# Altium PCB BEAGLEPLAYV020_220915.brd.PcbDoc (part 12 of 12)
Units mil, origin at the board's own origin, x right, y up, seen from the top; angles counter-clockwise.
Board outline 3149.7 x 3149.7 mil, 8 copper layers (TOP, LYR2_GND, LYR3, LAY4_PWR1, LAY5_PWR2, LAY6, LYR7_GND, BOTTOM), stack 60.84 mil thick; 782 components, 546 nets, 2864 pads, 2056 vias.
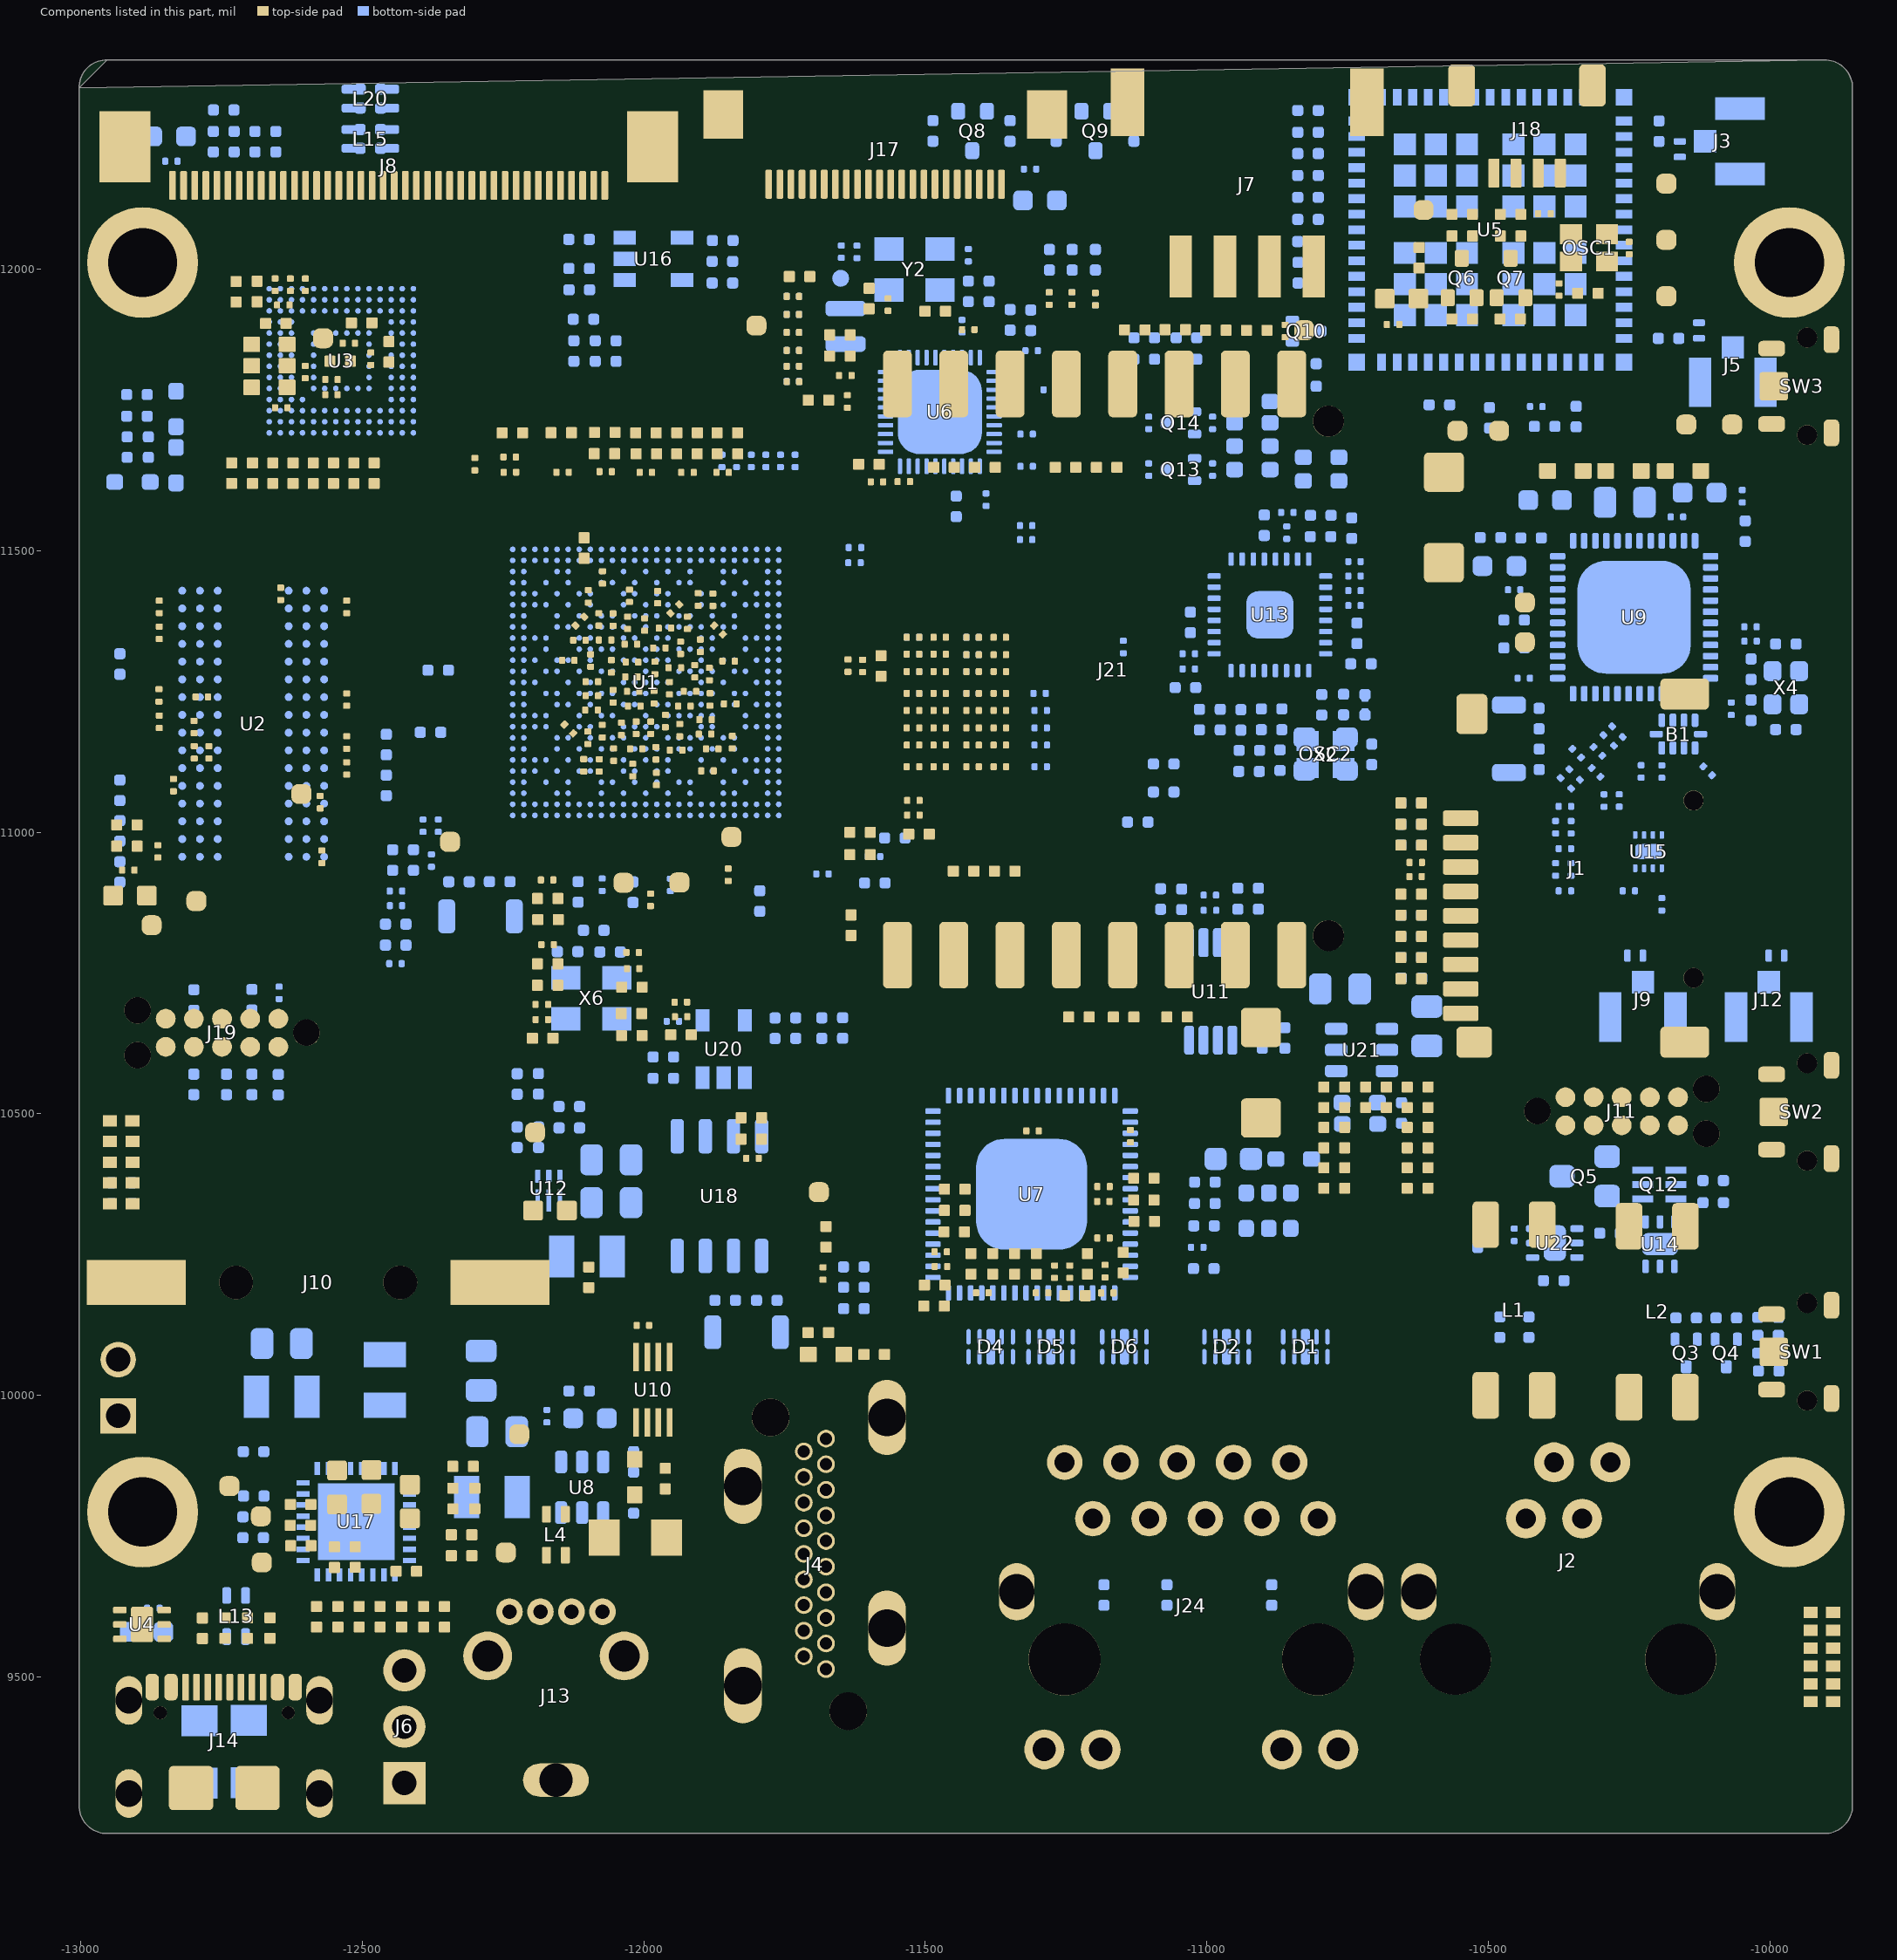
[diagram p18: the components of this part, seen from the top]

## Polygon pours and split planes (outlines as drawn) (continued)
VDD_1V8 on LYR3 "LYR3-VDD_1V8" (solid, pour order 86): -11875,11350 -11924,11350 -11933,11341 -12111,11341 -12126,11326 -12126,11301 -12118,11293 -11951,11293 -11943,11285 -11903,11285 -11895,11293 -11850,11338 -11850,11350 -11856,11356 -11869,11356
GND_EARTH on LYR3 "LYR3-GND_EARTH" (solid, pour order 128): 67 vertices, not listed, extent -12990,9233 -9890,9834
VDD_1V2 on LYR3 "LYR3-VDD_1V2" (solid, pour order 116): 20 vertices, not listed, extent -11716,10131 -11223,10385
N16127607 on LYR3 "LYR3-N16127607" (solid, pour order 89): 23 vertices, not listed, extent -11526,10217 -11150,10479
VDDA_CORE_CSI on LYR3 "LYR3-VDDA_CORE_CSI" (solid, pour order 90): 19 vertices, not listed, extent -11988,11352 -11838,11621
GND on LYR3 "LYR3-GND 1" (solid, pour order 123): -10561,10394 -10123,10394 -10088,10359 -10088,9985 -10158,9915 -10623,9915 -10633,9925 -10633,10321 -10561,10393
GND_EARTH on LYR7_GND "LYR7_GND-GND_EARTH" (solid, pour order 131): 67 vertices, not listed, extent -12990,9233 -9890,9851
GND on LYR7_GND "LYR7_GND-GND" (solid, pour order 146): 112 vertices, not listed, extent -12974,9283 -9864,12355

## Keep-outs
LYR7_GND:
  region: -10311.29,11176.01 cw(c-10295.7,11172.44) -10295.7,11188.43 cw(c-10295.7,11172.43) -10279.7,11172.43 -10279.7,11162.35 -10301.9,11140.16 cw(c-10313.22,11151.47) -10313.21,11135.47 cw(c-10313.21,11151.47) -10329.21,11151.47 cw(c-10313.21,11151.46) -10324.52,11162.78
  region: -10369.09,10923 cw(c-10353.09,10923) -10337.09,10923 -10337.09,10896 cw(c-10353.09,10896) -10369.09,10896
  region: -10241.21,10952.97 -10237.29,10952.97 cw(c-10237.29,10941) -10225.32,10941 -10225.32,10931.16 cw(c-10237.29,10931.16) -10237.29,10919.19 -10241.21,10919.19 cw(c-10241.21,10931.16) -10253.18,10931.16 -10253.18,10941 cw(c-10241.21,10941)
  region: -10208.01,11149.73 cw(c-10192.01,11149.73) -10176.01,11149.73 -10176.01,11118.73 cw(c-10192.01,11118.73) -10208.01,11118.73
  region: -10387.77,11096.35 cw(c-10371.77,11096.35) -10371.77,11112.35 cw(c-10371.78,11096.35) -10360.46,11107.66 -10341.78,11088.98 cw(c-10353.09,11077.66) -10337.09,11077.67 cw(c-10353.09,11077.67) -10353.09,11061.67 cw(c-10353.08,11077.67) -10364.4,11066.36 -10383.08,11085.04 cw(c-10371.77,11096.36)
  region: -10259.44,11893.09 -10198.3,11893.09 cw(c-10198.31,11877.09) -10186.99,11888.4 -10186.9,11888.31 cw(c-10198.21,11876.99) -10182.21,11877 cw(c-10198.21,11877) -10198.21,11861 cw(c-10198.21,11877) -10199.9,11861.09 -10259.44,11861.09 cw(c-10259.44,11877.09)
  region: -10369.09,11046.04 cw(c-10353.09,11046.04) -10337.09,11046.04 -10337.09,11020 cw(c-10353.09,11020) -10369.09,11020
  region: -10365.22,11125.87 cw(c-10356.74,11117.39) -10348.26,11125.87 -10342.25,11119.86 cw(c-10350.73,11111.38) -10342.25,11102.9 -10347.2,11097.95 cw(c-10355.68,11106.43) -10364.16,11097.95 -10370.17,11103.96 cw(c-10361.69,11112.44) -10370.17,11120.92
  region: -10286.44,11169.75 -10277.01,11169.75 cw(c-10277.01,11153.75) -10261.01,11153.75 cw(c-10277.02,11153.75) -10272.55,11138.38 -10286.34,11124.6 cw(c-10297.66,11135.91) -10297.65,11119.91 cw(c-10297.65,11135.91) -10313.65,11135.91 cw(c-10297.65,11135.9) -10308.96,11147.22
  region: -10435.9,10122.77 -10420.12,10122.77 cw(c-10420.14,10110.81) -10408.17,10110.82 -10408.17,10095.04 cw(c-10420.14,10095.06) -10420.12,10083.09 -10435.9,10083.09 cw(c-10435.89,10095.06) -10447.85,10095.04 -10447.85,10110.82 cw(c-10435.89,10110.81)
  region: -10168.86,12237.68 -10151.14,12237.68 cw(c-10151.15,12230.72) -10144.18,12230.72 -10144.18,12222.84 cw(c-10151.15,12222.84) -10151.14,12215.88 -10168.86,12215.88 cw(c-10168.85,12222.84) -10175.82,12222.84 -10175.82,12230.72 cw(c-10168.85,12230.72)
  region: -10229.52,10801.82 -10221.62,10801.82 cw(c-10221.64,10789.85) -10209.67,10789.87 -10209.67,10772.13 cw(c-10221.64,10772.15) -10221.62,10760.18 -10229.52,10760.18 cw(c-10229.5,10772.15) -10241.47,10772.13 -10241.47,10789.87 cw(c-10229.5,10789.85)
  region: -10169.67,11891.84 -10153.91,11891.84 cw(c-10153.92,11884.88) -10146.95,11884.88 -10146.95,11869.12 cw(c-10153.92,11869.12) -10153.91,11862.16 -10169.67,11862.16 cw(c-10169.67,11869.12) -10176.63,11869.12 -10176.63,11884.88 cw(c-10169.67,11884.88)
  region: -10369.09,11077.67 cw(c-10353.09,11077.67) -10337.09,11077.67 -10337.09,11046.04 cw(c-10353.09,11046.04) -10369.09,11046.04
  region: -10204.88,12241.63 -10189.12,12241.63 cw(c-10189.12,12234.67) -10182.16,12234.67 -10182.16,12218.91 cw(c-10189.12,12218.92) -10189.12,12211.95 -10204.88,12211.95 cw(c-10204.88,12218.92) -10211.84,12218.91 -10211.84,12234.67 cw(c-10204.88,12234.67)
  region: -10356.59,10987.24 -10349.59,10987.24 cw(c-10349.59,10975.24) -10337.59,10975.24 -10337.59,10966.74 cw(c-10349.59,10966.74) -10349.59,10954.74 -10356.59,10954.74 cw(c-10356.59,10966.74) -10368.59,10966.74 -10368.59,10975.24 cw(c-10356.59,10975.24)
  region: -10286.02,11167.71 cw(c-10277.54,11159.23) -10269.06,11167.71 -10263.05,11161.7 cw(c-10271.53,11153.22) -10263.05,11144.74 -10268,11139.79 cw(c-10276.48,11148.27) -10284.96,11139.79 -10290.97,11145.8 cw(c-10282.49,11154.28) -10290.97,11162.76
  region: -10128.64,11893 cw(c-10126,11877.22) -10126,11893.22 cw(c-10126,11877.22) -10110,11877.22 cw(c-10126,11877.23) -10114.69,11865.91 -10114.91,11865.69 cw(c-10126.23,11877) -10126.22,11861 -10161.79,11861 cw(c-10161.79,11877) -10161.79,11893
  region: -10006.17,10801.82 -9998.27,10801.82 cw(c-9998.28,10789.85) -9986.32,10789.87 -9986.32,10772.13 cw(c-9998.28,10772.15) -9998.27,10760.18 -10006.17,10760.18 cw(c-10006.16,10772.15) -10018.12,10772.13 -10018.12,10789.87 cw(c-10006.16,10789.85)
  region: -10380.52,11036 -10353.09,11036 cw(c-10353.09,11020) -10353.09,11004 -10380.52,11004 cw(c-10380.52,11020)
  region: -10148.95,11149.73 cw(c-10132.95,11149.73) -10116.95,11149.73 ccw(c-10089.03,11149.72) -10108.78,11129.99 -10107,11128.21 cw(c-10118.31,11116.89) -10102.31,11116.9 cw(c-10118.31,11116.9) -10118.31,11100.9 cw(c-10118.3,11116.9) -10129.62,11105.59 -10131.4,11107.37 cw(c-10089.04,11149.74)
  region: -10241.57,10781 cw(c-10225.57,10781) -10209.57,10781 -10209.57,10734.02 cw(c-10225.57,10734.02) -10241.57,10734.02
  region: -10487.56,10122.77 -10471.78,10122.77 cw(c-10471.8,10110.81) -10459.83,10110.82 -10459.83,10095.04 cw(c-10471.8,10095.06) -10471.78,10083.09 -10487.56,10083.09 cw(c-10487.55,10095.06) -10499.51,10095.04 -10499.51,10110.82 cw(c-10487.55,10110.81)
  region: -10195.94,11171.54 -10188.08,11171.54 cw(c-10188.08,11159.57) -10176.11,11159.57 -10176.11,11139.89 cw(c-10188.08,11139.89) -10188.08,11127.92 -10195.94,11127.92 cw(c-10195.94,11139.89) -10207.91,11139.89 -10207.91,11159.57 cw(c-10195.94,11159.57)
  region: -10384.77,10960.5 -10376.27,10960.5 cw(c-10376.27,10948.5) -10364.27,10948.5 -10364.27,10941.5 cw(c-10376.27,10941.5) -10376.27,10929.5 -10384.77,10929.5 cw(c-10384.77,10941.5) -10396.77,10941.5 -10396.77,10948.5 cw(c-10384.77,10948.5)
  region: -10384.77,11035.5 -10376.27,11035.5 cw(c-10376.27,11023.5) -10364.27,11023.5 -10364.27,11016.5 cw(c-10376.27,11016.5) -10376.27,11004.5 -10384.77,11004.5 cw(c-10384.77,11016.5) -10396.77,11016.5 -10396.77,11023.5 cw(c-10384.77,11023.5)
  region: -10265.07,10912.25 -10258.07,10912.25 cw(c-10258.07,10900.25) -10246.07,10900.25 -10246.07,10891.75 cw(c-10258.07,10891.75) -10258.07,10879.75 -10265.07,10879.75 cw(c-10265.07,10891.75) -10277.07,10891.75 -10277.07,10900.25 cw(c-10265.07,10900.25)
  region: -10347.09,11143.66 cw(c-10335.44,11132.68) -10335.44,11148.69 cw(c-10335.44,11132.69) -10319.44,11132.69 -10319.44,11132.68 cw(c-10335.44,11132.69) -10324.13,11121.37 -10344.9,11100.6 cw(c-10356.22,11111.91) -10356.21,11095.91 cw(c-10356.21,11111.91) -10372.21,11111.91 cw(c-10356.21,11111.9) -10367.52,11123.22
  region: -10134.86,11888.12 -10117.14,11888.12 cw(c-10117.15,11881.16) -10110.18,11881.16 -10110.18,11873.28 cw(c-10117.15,11873.28) -10117.14,11866.32 -10134.86,11866.32 cw(c-10134.85,11873.28) -10141.82,11873.28 -10141.82,11881.16 cw(c-10134.85,11881.16)
  region: -10208.01,10861 cw(c-10192.01,10861) -10176.01,10861 cw(c-10304.12,10861.01) -10213.54,10770.41 -10214.26,10769.69 cw(c-10225.58,10781) -10225.57,10765 cw(c-10225.57,10781) -10241.57,10781 cw(c-10225.57,10780.99) -10236.88,10792.31 -10236.16,10793.03 ccw(c-10304.13,10860.99)
  region: -10356.59,10912.25 -10349.59,10912.25 cw(c-10349.59,10900.25) -10337.59,10900.25 -10337.59,10891.75 cw(c-10349.59,10891.75) -10349.59,10879.75 -10356.59,10879.75 cw(c-10356.59,10891.75) -10368.59,10891.75 -10368.59,10900.25 cw(c-10356.59,10900.25)
  region: -10357.34,10960.5 -10348.84,10960.5 cw(c-10348.84,10948.5) -10336.84,10948.5 -10336.84,10941.5 cw(c-10348.84,10941.5) -10348.84,10929.5 -10357.34,10929.5 cw(c-10357.34,10941.5) -10369.34,10941.5 -10369.34,10948.5 cw(c-10357.34,10948.5)
  region: -10324.6,11128.08 cw(c-10316.12,11119.6) -10307.64,11128.08 -10302.69,11123.13 cw(c-10311.17,11114.65) -10302.69,11106.17 -10308.7,11100.16 cw(c-10317.18,11108.64) -10325.66,11100.16 -10330.61,11105.11 cw(c-10322.13,11113.59) -10330.61,11122.07
  region: -10206.09,11891.84 -10190.33,11891.84 cw(c-10190.33,11884.88) -10183.37,11884.88 -10183.37,11869.12 cw(c-10190.33,11869.12) -10190.33,11862.16 -10206.09,11862.16 cw(c-10206.08,11869.12) -10213.05,11869.12 -10213.05,11884.88 cw(c-10206.08,11884.88)
  region: -10328.3,11125.09 cw(c-10316.65,11114.11) -10316.65,11130.12 cw(c-10316.65,11114.12) -10300.65,11114.12 -10300.65,11114.11 cw(c-10316.65,11114.12) -10305.34,11102.8 -10326.22,11081.92 cw(c-10337.54,11093.23) -10337.53,11077.23 cw(c-10337.53,11093.23) -10353.53,11093.23 cw(c-10337.53,11093.22) -10348.84,11104.54
  region: -10196.26,10898.5 -10187.76,10898.5 cw(c-10187.76,10886.5) -10175.76,10886.5 -10175.76,10879.5 cw(c-10187.76,10879.5) -10187.76,10867.5 -10196.26,10867.5 cw(c-10196.26,10879.5) -10208.26,10879.5 -10208.26,10886.5 cw(c-10196.26,10886.5)
  region: -10356.59,11062.29 -10349.59,11062.29 cw(c-10349.59,11050.29) -10337.59,11050.29 -10337.59,11041.79 cw(c-10349.59,11041.79) -10349.59,11029.79 -10356.59,11029.79 cw(c-10356.59,11041.79) -10368.59,11041.79 -10368.59,11050.29 cw(c-10356.59,11050.29)
  region: -10253.25,10936.08 cw(c-10239.25,10936.08) -10225.25,10936.08 -10225.25,10930.97 cw(c-10239.25,10923.22) -10223.25,10923.22 -10223.25,10896.32 cw(c-10239.25,10896.33) -10227.94,10885.01 -10228.26,10884.69 cw(c-10239.58,10896) -10239.57,10880 cw(c-10239.57,10896) -10255.57,10896 cw(c-10239.57,10896) -10255.25,10899.18 -10255.25,10923.22 cw(c-10239.25,10923.22) -10253.25,10930.97
  region: -10243.07,10912.25 -10236.07,10912.25 cw(c-10236.07,10900.25) -10224.07,10900.25 -10224.07,10891.75 cw(c-10236.07,10891.75) -10236.07,10879.75 -10243.07,10879.75 cw(c-10243.07,10891.75) -10255.07,10891.75 -10255.07,10900.25 cw(c-10243.07,10900.25)
  region: -10353.09,10912 -10261.57,10912 cw(c-10261.57,10896) -10261.57,10880 -10353.09,10880 cw(c-10353.09,10896)
  region: -10362.1,11091.63 cw(c-10353.62,11083.15) -10345.14,11091.63 -10339.13,11085.62 cw(c-10347.61,11077.14) -10339.13,11068.66 -10344.08,11063.71 cw(c-10352.56,11072.19) -10361.04,11063.71 -10367.05,11069.72 cw(c-10358.57,11078.2) -10367.05,11086.68
  region: -10136.88,11171.54 -10129.02,11171.54 cw(c-10129.02,11159.57) -10117.05,11159.57 -10117.05,11139.89 cw(c-10129.02,11139.89) -10129.02,11127.92 -10136.88,11127.92 cw(c-10136.88,11139.89) -10148.85,11139.89 -10148.85,11159.57 cw(c-10136.88,11159.57)
  region: -10313.01,11140.39 cw(c-10297.65,11135.91) -10297.65,11151.91 cw(c-10297.65,11135.91) -10281.65,11135.91 -10281.65,11126.49 -10305.34,11102.81 cw(c-10316.66,11114.12) -10316.65,11098.12 cw(c-10316.65,11114.12) -10332.65,11114.12 cw(c-10316.65,11114.11) -10327.96,11125.43
  region: -10304.71,11186.39 cw(c-10296.23,11177.91) -10287.75,11186.39 -10281.74,11180.38 cw(c-10290.22,11171.9) -10281.74,11163.42 -10286.69,11158.47 cw(c-10295.17,11166.95) -10303.65,11158.47 -10309.66,11164.48 cw(c-10301.18,11172.96) -10309.66,11181.44
  region: -10369.09,10970.99 cw(c-10353.09,10970.99) -10337.09,10970.99 -10337.09,10945 cw(c-10353.09,10945) -10369.09,10945
  region: -10118.75,11101.34 cw(c-10102.75,11101.34) -10102.75,11117.34 cw(c-10102.76,11101.34) -10091.44,11112.65 cw(c-10345.45,10858.63) -9986.22,10858.64 -9986.22,10781 cw(c-10002.22,10781) -10018.22,10781 -10018.22,10858.64 ccw(c-10345.45,10858.65) -10114.06,11090.03 cw(c-10102.75,11101.35)
  region: -10384.77,11013.5 -10376.27,11013.5 cw(c-10376.27,11001.5) -10364.27,11001.5 -10364.27,10994.5 cw(c-10376.27,10994.5) -10376.27,10982.5 -10384.77,10982.5 cw(c-10384.77,10994.5) -10396.77,10994.5 -10396.77,11001.5 cw(c-10384.77,11001.5)
  region: -10369.09,10998 cw(c-10353.09,10998) -10337.09,10998 -10337.09,10970.99 cw(c-10353.09,10970.99) -10369.09,10970.99
  region: -10391.09,10958.11 -10391.09,10970.99 cw(c-10375.09,10970.99) -10359.09,10970.99 -10359.09,10958.11 cw(c-10393.63,10958.12) -10369.21,10933.69 cw(c-10380.53,10945) -10380.52,10929 cw(c-10380.52,10945) -10396.52,10945 cw(c-10380.52,10944.99) -10391.83,10956.31 ccw(c-10393.63,10958.1)
  region: -10200.08,12278.91 cw(c-10197,12263.21) -10197,12279.21 cw(c-10197,12263.21) -10181,12263.21 cw(c-10197,12263.22) -10185.69,12251.9 -10185.99,12251.6 cw(c-10197.31,12262.91) -10197.3,12246.91 -10259.44,12246.91 cw(c-10259.44,12262.91) -10259.44,12278.91
  region: -10193.97,10952.97 -10190.05,10952.97 cw(c-10190.05,10941) -10178.08,10941 -10178.08,10931.16 cw(c-10190.05,10931.16) -10190.05,10919.19 -10193.97,10919.19 cw(c-10193.97,10931.16) -10205.94,10931.16 -10205.94,10941 cw(c-10193.97,10941)
  region: -10346.54,11107.19 cw(c-10338.06,11098.71) -10329.58,11107.19 -10323.57,11101.18 cw(c-10332.05,11092.7) -10323.57,11084.22 -10328.52,11079.27 cw(c-10337,11087.75) -10345.48,11079.27 -10351.49,11085.28 cw(c-10343.01,11093.76) -10351.49,11102.24
  region: -10117.65,12242.78 cw(c-10115.01,12227) -10115.01,12243 cw(c-10115.01,12227) -10099.01,12227 cw(c-10115.02,12227) -10103.69,12215.69 cw(c-10115.54,12227.53) -10115.5,12210.78 cw(c-10115.52,12226.78) -10115.54,12210.78 -10160,12210.78 cw(c-10160,12226.78) -10160,12242.78
  region: -10018.22,10781 cw(c-10002.22,10781) -9986.22,10781 -9986.22,10734.02 cw(c-10002.22,10734.02) -10018.22,10734.02
  region: -10357.34,11035.5 -10348.84,11035.5 cw(c-10348.84,11023.5) -10336.84,11023.5 -10336.84,11016.5 cw(c-10348.84,11016.5) -10348.84,11004.5 -10357.34,11004.5 cw(c-10357.34,11016.5) -10369.34,11016.5 -10369.34,11023.5 cw(c-10357.34,11023.5)
  region: -10488.99,10083.33 cw(c-10472.99,10083.33) -10472.99,10099.33 cw(c-10473,10083.33) -10461.68,10094.64 -10448.66,10081.63 -10448.66,9889.29 -10410.13,9850.76 -10380.35,9850.76 -10322.11,9792.51 cw(c-10333.42,9781.19) -10317.42,9781.2 cw(c-10333.42,9781.2) -10333.42,9765.2 cw(c-10333.41,9781.2) -10344.73,9769.89 -10393.61,9818.76 -10423.39,9818.76 -10480.66,9876.03 -10480.66,10068.37 -10484.3,10072.02 cw(c-10472.99,10083.34)
  region: -10321.16,11165.43 cw(c-10312.68,11156.95) -10304.2,11165.43 -10299.25,11160.48 cw(c-10307.73,11152) -10299.25,11143.52 -10305.26,11137.51 cw(c-10313.74,11145.99) -10322.22,11137.51 -10327.17,11142.46 cw(c-10318.69,11150.94) -10327.17,11159.42
  region: -10126.26,11130.86 cw(c-10117.78,11122.38) -10109.3,11130.86 -10104.35,11125.91 cw(c-10112.83,11117.43) -10104.35,11108.95 -10110.36,11102.94 cw(c-10118.84,11111.42) -10127.32,11102.94 -10132.27,11107.89 cw(c-10123.79,11116.37) -10132.27,11124.85
  region: -10110.7,11115.3 cw(c-10102.22,11106.82) -10093.74,11115.3 -10088.79,11110.35 cw(c-10097.27,11101.87) -10088.79,11093.39 -10094.8,11087.38 cw(c-10103.28,11095.86) -10111.76,11087.38 -10116.71,11092.33 cw(c-10108.23,11100.81) -10116.71,11109.29
  region: -10206.01,10936.08 cw(c-10192.01,10936.08) -10178.01,10936.08 -10178.01,10930.97 cw(c-10192.01,10923.22) -10176.01,10923.22 -10176.01,10883 cw(c-10192.01,10883) -10208.01,10883 -10208.01,10923.22 cw(c-10192.01,10923.22) -10206.01,10930.97
  region: -10126,11893.22 -10098.63,11893.22 cw(c-10098.64,11837.58) -10059.29,11876.92 -10054.69,11872.32 cw(c-10066,11861) -10050,11861.01 cw(c-10066,11861.01) -10066,11845.01 cw(c-10065.99,11861.01) -10077.31,11849.7 -10081.91,11854.3 ccw(c-10098.62,11837.58) -10098.63,11861.22 -10126,11861.22 cw(c-10126,11877.22)
  region: -10447.64,10094.64 cw(c-10436.32,10083.33) -10436.33,10099.33 cw(c-10436.33,10083.33) -10420.33,10083.33 cw(c-10436.33,10083.34) -10425.02,10072.02 -10428.66,10068.37 -10428.66,10015.66 -10426.03,10013.03 -10376.37,10013.03 -10355,9991.66 -10355,9954.4 -10376.37,9933.03 -10426.03,9933.03 -10428.66,9930.4 -10428.66,9902.29 -10423.57,9897.2 -10383.42,9897.2 cw(c-10383.42,9881.2) -10383.42,9865.2 -10436.83,9865.2 -10460.66,9889.03 -10460.66,9943.66 -10439.29,9965.03 -10389.63,9965.03 -10387,9967.66 -10387,9978.4 -10389.63,9981.03 -10439.29,9981.03 -10460.66,10002.4 -10460.66,10081.63
  region: -10305.6,11149.87 cw(c-10297.12,11141.39) -10288.64,11149.87 -10283.69,11144.92 cw(c-10292.17,11136.44) -10283.69,11127.96 -10289.7,11121.95 cw(c-10298.18,11130.43) -10306.66,11121.95 -10311.61,11126.9 cw(c-10303.13,11135.38) -10311.61,11143.86
  region: -10357.34,10938.5 -10348.84,10938.5 cw(c-10348.84,10926.5) -10336.84,10926.5 -10336.84,10919.5 cw(c-10348.84,10919.5) -10348.84,10907.5 -10357.34,10907.5 cw(c-10357.34,10919.5) -10369.34,10919.5 -10369.34,10926.5 cw(c-10357.34,10926.5)
  region: -10197,12242.79 -10160.02,12242.79 cw(c-10160.02,12226.79) -10160.02,12210.79 -10197,12210.79 cw(c-10197,12226.79)
  region: -10323.29,11167.47 -10313.21,11167.47 cw(c-10313.21,11151.47) -10297.21,11151.47 cw(c-10313.2,11151.47) -10309.63,11135.88 -10324.13,11121.38 cw(c-10335.45,11132.69) -10335.44,11116.69 cw(c-10335.44,11132.69) -10351.44,11132.69 cw(c-10335.44,11132.68) -10346.75,11144
  region: -10343.39,11146.65 cw(c-10334.91,11138.17) -10326.43,11146.65 -10321.48,11141.7 cw(c-10329.96,11133.22) -10321.48,11124.74 -10327.49,11118.73 cw(c-10335.97,11127.21) -10344.45,11118.73 -10349.4,11123.68 cw(c-10340.92,11132.16) -10349.4,11140.64
  region: -10380.78,11110.31 cw(c-10372.3,11101.83) -10363.82,11110.31 -10357.81,11104.3 cw(c-10366.29,11095.82) -10357.81,11087.34 -10362.76,11082.39 cw(c-10371.24,11090.87) -10379.72,11082.39 -10385.73,11088.4 cw(c-10377.25,11096.88) -10385.73,11105.36
  region: -10208.01,11096.73 cw(c-10192.01,11096.73) -10176.01,11096.73 -10176.01,11007 cw(c-10192.01,11007) -10178.01,10999.25 -10178.01,10995.14 cw(c-10192.01,10995.14) -10206.01,10995.14 -10206.01,10999.25 cw(c-10192.01,11007) -10208.01,11007
  region: -10204.88,12278.05 -10189.12,12278.05 cw(c-10189.12,12271.08) -10182.16,12271.09 -10182.16,12255.33 cw(c-10189.12,12255.33) -10189.12,12248.37 -10204.88,12248.37 cw(c-10204.88,12255.33) -10211.84,12255.33 -10211.84,12271.09 cw(c-10204.88,12271.08)
  region: -10196.26,11112.23 -10187.76,11112.23 cw(c-10187.76,11100.23) -10175.76,11100.23 -10175.76,11093.23 cw(c-10187.76,11093.23) -10187.76,11081.23 -10196.26,11081.23 cw(c-10196.26,11093.23) -10208.26,11093.23 -10208.26,11100.23 cw(c-10196.26,11100.23)
  region: -10380.52,11014 -10353.09,11014 cw(c-10353.09,10998) -10353.09,10982 -10380.52,10982 cw(c-10380.52,10998)
  region: -10196.26,11134.23 -10187.76,11134.23 cw(c-10187.76,11122.23) -10175.76,11122.23 -10175.76,11115.23 cw(c-10187.76,11115.23) -10187.76,11103.23 -10196.26,11103.23 cw(c-10196.26,11115.23) -10208.26,11115.23 -10208.26,11122.23 cw(c-10196.26,11122.23)
  region: -10193.97,11012.03 -10190.05,11012.03 cw(c-10190.05,11000.06) -10178.08,11000.06 -10178.08,10990.22 cw(c-10190.05,10990.22) -10190.05,10978.25 -10193.97,10978.25 cw(c-10193.97,10990.22) -10205.94,10990.22 -10205.94,11000.06 cw(c-10193.97,11000.06)
  region: -10378.59,10987.24 -10371.59,10987.24 cw(c-10371.59,10975.24) -10359.59,10975.24 -10359.59,10966.74 cw(c-10371.59,10966.74) -10371.59,10954.74 -10378.59,10954.74 cw(c-10378.59,10966.74) -10390.59,10966.74 -10390.59,10975.24 cw(c-10378.59,10975.24)
  region: -10140.01,12202 -10090.01,12202 -10090.01,12252 -10140.01,12252
  region: -10279.2,12250.04 -10239.68,12250.04 -10239.68,12275.78 -10279.2,12275.78
  region: -10279.2,11864.22 -10239.68,11864.22 -10239.68,11889.96 -10279.2,11889.96
  region: -10287.59,9781.2 -10289.15,9793.06 -10293.73,9804.12 -10301.01,9813.61 -10310.5,9820.89 -10321.56,9825.47 -10333.42,9827.03 -10345.28,9825.47 -10356.34,9820.89 -10365.83,9813.61 -10373.11,9804.12 -10377.69,9793.06 -10379.25,9781.2 -10377.69,9769.34 -10373.11,9758.28 -10365.83,9748.79 -10356.34,9741.51 -10345.28,9736.93 -10333.42,9735.37 -10321.56,9736.93 -10310.5,9741.51 -10301.01,9748.79 -10293.73,9758.28 -10289.15,9769.34 -10287.59,9781.2
  region: -10032.22,10704.02 -9972.22,10704.02 -9972.22,10764.02 -10032.22,10764.02
  region: -10091,11836.01 -10041,11836.01 -10041,11886.01 -10091,11886.01
  region: -10337.59,9881.2 -10339.15,9893.06 -10343.73,9904.12 -10351.01,9913.61 -10360.5,9920.89 -10371.56,9925.47 -10383.42,9927.03 -10395.28,9925.47 -10406.34,9920.89 -10415.83,9913.61 -10423.11,9904.12 -10427.69,9893.06 -10429.25,9881.2 -10427.69,9869.34 -10423.11,9858.28 -10415.83,9848.79 -10406.34,9841.51 -10395.28,9836.93 -10383.42,9835.37 -10371.56,9836.93 -10360.5,9841.51 -10351.01,9848.79 -10343.73,9858.28 -10339.15,9869.34 -10337.59,9881.2
  region: -10255.57,10704.02 -10195.57,10704.02 -10195.57,10764.02 -10255.57,10764.02

## Other copper
LYR2_GND:
  region net GND: 194 vertices and 879 holes, not listed, extent -12974,9283 -9864,12355

## Silkscreen, mask and mechanical layers (free items; w line width, h text height)
Top Overlay:
  drawing of 68322 lines, arcs and shapes, not listed
  text "QWIIC" at -10588,12175 h30 r90
  text "OLDI" at -12500,12079 h30
  text "CSI" at -11617,12079 h30
  text "GROVE" at -11352,12006 h30
  text "BeaglePlay v0.2" at -12291,11863 h40
  text "USR" at -10032,11765 h30 r90
  text "MICRO SD" at -10228,11293 h30
  text "MIKROBUS" at -11675,11172 h30 r90
  text "JTAG-AM62" at -12909,10728 h30
  text "RTC-BAT" at -12496,10544 h30
  text "USR-LED" at -12992,10516 h30
  text "CR1220" at -12496,10501 h30
  text "0" at -12880,10476 h30
  text "RST" at -10032,10442 h30 r90
  text "1" at -12880,10436 h30
  text "2" at -12881,10398 h30
  text "JTAG-CC1352P" at -10488,10398 h30
  text "3" at -12883,10360 h30
  text "4" at -12882,10322 h30
  text "VPP" at -12982,10121 h30
  text "PWR" at -10033,10029 h30 r90
  text "GND" at -12876,9944 h30
  text "USB2.0" at -12250,9664 h30
  text "USB" at -12796,9513 h30
  text "TX" at -12332.39,9475.62 h30 r90
  text "PWR" at -9948,9405 h23
  text "RX" at -12330.22,9377.04 h30 r90
  text "WL" at -9945,9374 h23
  text "RF2" at -9947,9342 h23
  text "RF1" at -9947,9309 h23
  text "G" at -12360.36,9291.62 h30
  text "SP2" at -9950,9278 h23
  text "UART" at -12495,9256 h30 r90
  text "ETHERNET" at -11368,9251 h30 r90
  text "HDMI" at -11873,9250 h30 r90
  text "SP1" at -9950,9248 h23
  text "ETHERNET" at -9981,9238 h30 r90
  text "SINGLE-PAIR" at -10030,9236 h30 r90
Bottom Overlay:
  text "ANT2" at -9985.5,12324 h30
  text "ANT1" at -9997.5,11695 h30
  text "2.4G" at -9957,10567 h30
  text "SUBG" at -10162,10565 h30
Bottom Solder:
  lines w40: -10245.3,10823 -10564,10823 -10564,11661 -9903.65,11661 -9903.65,10823 -9965.41,10823 ; -10127.76,10823 -10066.63,10823
OUTLINE:
  drawing of 5302 lines, arcs and shapes, not listed
  text "1" at -14341.13,23480.86 h225
  text "2" at -10207.28,23480.86 h225
  text "3" at -6073.42,23480.86 h225
  text "4" at -1939.56,23480.86 h225
  text "5" at 2194.3,23480.86 h225
  text "6" at 6328.16,23480.86 h225
  text "7" at 10462.02,23480.86 h225
  text "8" at 14595.87,23480.86 h225
  text "REVISIONS" at 11462.02,23047.79 h225
  text "REV" at 8647.35,22743.46 h80
  text "ACTION" at 9412.63,22735.06 h80
  text "DATE" at 13670.5,22735.06 h80
  text "AUTH" at 15245.3,22735.06 h80
  text "LAYERS LAMINATION & IMPENDANCE  CONTROL" at -12332.37,21911.73 h225
  text "IMPEDANCE" at -6120.7,21570.03 h80
  text "SINGLE 50ohm+/-10%" at -6521.68,21380.81 h80
  text "DIFFERENCE 90ohm-/+10%" at -2284.7,21376.81 h80
  text "DIFFERENCE 100ohm-/+10%" at -204.72,21376.81 h80
  text "SINGLE 40ohm+/-10%" at -8469.68,21375.81 h80
  text "DIFFERENCE 80ohm-/+10%" at -4443.7,21370.81 h80
  text "LAYERS STACKUP" at -14207.74,21362.78 h80
  text "LAYER" at -12187.88,21362.78 h80
  text "MATERIAL" at -11535.7,21362.78 h80
  text "THICKNESS" at -10754.01,21362.78 h80
  text "LAYER TYPE" at -9828.93,21362.78 h80
  text "Line width(mil)" at -6383.68,21183.96 h80
  text "Line width/Space(mil)" at -2278.07,21179.96 h80
  text "Line width/Space(mil)" at -112.72,21179.96 h80
  text "Line width(mil)" at -8331.68,21178.96 h80
  text "Line width/Space(mil)" at -4437.07,21173.96 h80
  text "W:4" at -6144.59,20944.22 h80
  text "W:4.1/S:7" at -1929.04,20940.34 h80
  text "W:6.6" at -8092.59,20939.22 h80
  text "W:3.3/S:8" at 217.57,20938.51 h80
  text "W:4.3/S:4" at -4088.04,20934.34 h80
  text "COPPER" at -11416.08,20890.34 h80
  text "ROUTING" at -9723.93,20890.34 h80
  text "1 OZ" at -10636.17,20886.39 h80
  text "TOP" at -13830.01,20850.97 h80
  text "TOP" at -12176.46,20850.97 h80
  text "W:12/S:8 ref:L3" at 218,20814 h80
  text "D" at -16309.64,20724.96 h225
  text "D" at 16367.53,20724.96 h225
  text "FR4" at -11311.08,20575.38 h80
  text "PREPREG" at -12367.28,20546.41 h80
  text "3mil" at -10705.51,20540.74 h80
  text "PREPREG" at -14010.32,20536.01 h80
  text "COPPER" at -11416.08,20262.78 h80
  text "PLANE" at -9653.93,20260.42 h80
  text "1 OZ" at -10636.17,20243.42 h80
  text "L2 INNER" at -12413.28,20231.44 h80
  text "L2 INNER" at -14055.39,20221.05 h80
  text "FR4" at -11311.08,19947.82 h80
  text "PREPREG" at -12367.28,19916.48 h80
  text "3mil" at -10705.51,19910.82 h80
  text "PREPREG" at -14010.32,19906.09 h80
  text "ROUTING" at -9747,19656 h80
  text "W:3/S:7.3" at 66.15,19649.85 h80
  text "W:4.3/S:4.4" at -4308,19647 h80
  text "0.5 OZ" at -10636.17,19638.42 h80
  text "W:3.6/S:5.7" at -2154,19638 h80
  text "COPPER" at -11416.08,19632.86 h80
  text "W:3.8" at -6253.59,19626.56 h80
  text "W:6" at -8002.59,19610.56 h80
  text "L3 INNER" at -12413.28,19601.52 h80
  text "L3 INNER" at -14055.39,19591.13 h80
  text "NOTE" at 8430.52,19390.97 h225
  text "FR4" at -11311.08,19317.9 h80
  text "PREPREG" at -12367.28,19286.56 h80
  text "17.72mil" at -10659.51,19280.89 h80
  text "PREPREG" at -14010.32,19276.16 h80
  text "PLANE" at -9630,19024 h80
  text "COPPER" at -11416.08,19002.94 h80
  text "1 OZ" at -10636.17,18994.42 h80
  text "L4 INNER" at -12413.28,18971.6 h80
  text "L4 INNER" at -14055.39,18961.2 h80
  text "1. ACCEPTABILITY:" at 8427.8,18876.8 h80
  text "FR4" at -11311.08,18680.77 h80
  text "PRINTED WIRING BOARD SHALL MEET THE REQUIREMENTS OF IPC- 6012C CLASS 2." at 8794.63,18679.94 h80
  text "4mil" at -10656.17,18664.22 h80
  text "PREPREG" at -12367.28,18656.64 h80
  text "PREPREG" at -14010.32,18646.24 h80
  text "1 OZ" at -10636.17,18368.42 h80
  text "COPPER" at -11416.08,18353.06 h80
  text "PLANE" at -9643,18346 h80
  text "L5 INNER" at -12413.28,18341.68 h80
  text "L5 INNER" at -14055.39,18331.28 h80
  text "2. MATERIAL:" at 8427.8,18286.24 h80
  text "GLASS EPOXY FR-4 FIRE RETARDANT AND UL 94V-0 RATING MATERIAL SHOULD MEET" at 8794.63,18089.39 h80
  text "FR4" at -11311.08,18062.78 h80
  text "17.72mil" at -10636.17,18060.12 h80
  text "PREPREG" at -12367.28,18026.72 h80
  text "PREPREG" at -14010.32,18016.32 h80
  text "IPC-4101C" at 8794.63,17892.54 h80
  text "ROUTING" at -9689,17753 h80
  text "0.5 OZ" at -10652.88,17745.46 h80
  text "W:3/S:7.3" at 156,17734 h80
  text "W:3.8" at -6253,17733 h80
  text "W:4.3/S:4.4" at -4381,17730 h80
  text "COPPER" at -11416.08,17725.66 h80
  text "L6 INNER" at -12413.28,17711.76 h80
  text "W:6" at -7934,17706 h80
  text "W:3.6/S:5.7" at -2236,17704 h80
  text "L6 INNER" at -14055.39,17701.36 h80
  text "3. FABRICATION REQUIREMENTS:" at 8427.8,17498.84 h80
  text "FR4" at -11311.08,17416.67 h80
  text "3mil" at -10636.17,17416.52 h80
  text "PREPREG" at -12367.28,17396.8 h80
  text "PREPREG" at -14010.32,17386.4 h80
  text "A). FAB TO MEET THE REQUIREMENTS PER IPC-A-600, CLASS 2" at 8794.63,17301.99 h80
  text "COPPER" at -11416.08,17117.08 h80
  text "PLANE" at -9653.93,17107.67 h80
  text "B). ALL ARTWORK OR ELECTRONIC DATA MAY BE ADJUSTED BY THE BOARD" at 8794.63,17105.14 h80
  text "1 OZ" at -10636.17,17088.42 h80
  text "L7 INNER" at -12413.28,17081.84 h80
  text "L7 INNER" at -14055.39,17071.44 h80
  text "MANUFACTURER TO COMPENSATE FOR MANUFACTURING PROCESS TOLERANCES," at 9148.96,16908.29 h80
  text "FR4" at -11311.08,16779.96 h80
  text "PREPREG" at -12367.28,16766.88 h80
  text "3mil" at -10659.51,16761.21 h80
  text "PREPREG" at -14010.32,16756.48 h80
  text "ADDITION OF FILLETS TEARDROPS AT LINE / PAD INTERFACE IS PREFERRED." at 9148.96,16711.44 h80
  text "W:3.3/S:8" at 204.14,16544.46 h80
  text "W:4" at -6243.59,16532.59 h80
  text "W:6.6" at -8032.59,16531.59 h80
  text "THIEVING IS ALLOWED TO COMPENSATE FOR HIGH COPPER DENSITY AREAS" at 9148.96,16514.59 h80
  text "W:4.3/S:4" at -3919.56,16507.97 h80
  text "W:4.1/S:7" at -1968.56,16500.97 h80
  text "COPPER" at -11416.08,16489.78 h80
  text "1 OZ" at -10636.17,16490.42 h80
  text "ROUTING" at -9723.93,16452.25 h80
  text "L8 BOTTOM" at -14070,16437 h80
  text "L8 BOTTOM" at -12432.61,16430.5 h80
  text "W:12 ref:L6" at -6239,16412 h80
  text "W:12/S:8 ref L6" at 206,16409 h80
  text "C). FABRICATE ACCORDING TO THE FILES PART NO:" at 8794.63,16317.74 h80
  text "1001001000059_ MINI8600B_GERBER_Rev00 FILE FOR MANUFACTURING" at 9148.96,16120.89 h80
  text "D). SOLDER MASK COLOR  GREEN,SILKSCREEN COLOR  WHITE" at 8794.63,15924.04 h80
  text "E). FINISH ENIG/OSP/LF HASL" at 8794.63,15727.19 h80
  text "THE TOTAL THICKNESS:" at -12038.62,15535.28 h225
  text "1.6mm+/-10%" at -7274.13,15510.62 h225
  text "4. FABRICATION TOLERANCE:" at 8427.8,15333.49 h80
  text "A). WIRE WIDTH TOLERANCE INTERNAL CONTROL STANDARD +/-20%" at 8794.63,15136.64 h80
  text "B). PTH  DIAMETER TOLERANCE +/-0.076mm,NPTH DIAMETER TOLERANCE +/-0.05mm" at 8794.63,14939.79 h80
  text "C" at -16309.64,14819.44 h225
  text "C" at 16367.53,14819.44 h225
  text "C). ALL OUTER LAYER PADS REQUIRE +/-0.05mm TOLERANCE." at 8794.63,14742.94 h80
  text "D). LAYER REGISTRATION BETWEEN ADJACENT LAYER MAXIMUN 150um, THE INTERLAYER" at 8794.63,14546.09 h80
  text "DIELECTRIC THICKNESS TOLERANCE +/-15%" at 9148.96,14349.24 h80
  text "E). THICKNESS IS LESS THAN 1mm PCB TO A TOLERANCE OF +/-0.1mm,THICKNESS IS" at 8794.63,14152.39 h80
  text "GREATER THAN OR EQUAL TO 1mm PCB TO A TOLERANCE OF +/-10%" at 9148.96,13955.54 h80
  text "5. SOLDER MASK:" at 8427.8,13561.84 h80
  text "A). MATERIALS IN ACCORDANCE WITH IPC-SM-840E CLASS T STANDARDS AND ROHS" at 8794.63,13364.98 h80
  text "REQUIREMENTS" at 9148.96,13168.13 h80
  text "B). SOLDER MASK BOTH PRIMARY AND SECONDARY SIDES, THE ADHESION OF SOLDER" at 8794.63,12971.28 h80
  text "MASK MEET THE REQUIREMENTS OF IPC-A-600F LEVEL 2" at 9148.96,12774.43 h80
  text "C). SOLDER MASK COVERAGE ON THE MIDDLE OF THE COPPER WIRE MINIMUM 10um,EDGE" at 8794.63,12577.58 h80
  text "COVERAGE OF THE COPPER WIRE MINIMUM 4um, SOLDER MASK MISREGISTRATION" at 9148.96,12380.73 h80
  text "MAXIM 2.5mil" at 9148.96,12183.88 h80
  text "D). ALL HOLES WITH SOLDER MASK COVERED IN THE GERBER SHOULD BE PULGED" at 8794.63,11987.03 h80
  text "ALL VIAS IN PADS WITH HOLE DIAMETER LESS THAN 0.4mm SHOULD BE FILLED WITH" at 9178.51,11800.58 h80
  text "NON-CONDUCTIVE MATERIAL" at 9155.67,11603.73 h80
  text "E). SOLDER MASK BRIDGE BETWEEN PADS SHOULD BE MINIMUM 0.10mm" at 8792.26,11367.51 h80
  text "6. FINISH:" at 8388.42,10884.67 h80
  text "A). ENIG, GOLD THICKNESS IS 0.05 um ~0.23um,NICKEL THICKNESS IS 3 um ~6 um." at 8755.26,10687.82 h80
  text "B). OSP, THE OSP COATING THICKNESS IS 0.2 um ~0.5um." at 8755.26,10490.97 h80
  text "C). LF HASL, Sn THICKNESS IS 1 um ~40um ." at 8755.26,10294.12 h80
  text "7. SILKSCREEN:" at 8388.42,9821.68 h80
  text "A). PRIMARY AND SECONDARY SIDES USING A GLOSSY , NON-CONDUCTIVE, RoHS COMPLIANT," at 8755.26,9624.83 h80
  text "EPOXY BASED INK" at 9109.59,9427.98 h80
  text "B). NO SILKSCREEN ALLOWED ON PADS OR IN HOLES" at 8755.26,9231.13 h80
  text "C). MANUFACTUREERS CAN ADD SYMBOL IN SILKSCREEN LAYER OR SOLDER MASK LAYER," at 8755.26,9034.28 h80
  text "B" at -16309.64,8913.93 h225
  text "B" at 16367.53,8913.93 h225
  text "ALLOW TO INCREASE SYMBOL :ASSEMBLY REF , DATE CODE, LEAD-FREE SYMBOL, UL FILE" at 9109.59,8837.42 h80
  text "NUMBER,UL TYPE, UL SYMBOL AND FIRE RATING,NO LIST DOES NOT ALLOW TO INCREASE." at 9109.59,8640.58 h80
  text "8. BOW AND TWIST:" at 8427.8,8246.87 h80
  text "MAX BOW & TWIST OF PCB SHALL NOT EXCEED 0.75% OF MAXIMUN DIMENSION," at 8794.63,8050.02 h80
  text "MEASUREMENT METHOD IN 2.4.22 OF IPC-TM-650 IS FOR REFERENCE" at 8794.63,7853.17 h80
  text "9. MEASUREMENTS:" at 8427.8,7459.47 h80
  text "INTERPRET ALL DIMENSIONS AND TOLERANCES PER IPC-D-300G, CLASS B AND ALL" at 8794.63,7262.62 h80
  text "DIMENSIONS ARE METRIC, DIMENSIONS ARE AFTER ETCHING AND PLATING." at 8794.63,7065.77 h80
  text "10.ENVIRONMENTAL:" at 8427.8,6672.07 h80
  text "THE  PCB SUPPLIER SHALL PROVIDE A SIGNED CERTIFICATE OF COMPLIANCE BY" at 8794.63,6475.22 h80
  text "AUTHORIZED QA  REPRESENTATIVE. THE BASE MATERIAL OF PCB SHALL NOT CONTAIN THE" at 8794.63,6278.37 h80
  text "BANNED SUBSTANCES LISTED IN THE CERTIFICATE OF COMPLIANCE." at 8794.63,6081.52 h80
  text "A" at -16309.64,3008.42 h225
  text "A" at 16367.53,3008.42 h225
  text "Seeed Technology co.,Ltd." at 9084.06,2417.87 h225
  text "TITLE:" at 10065.18,1868.92 h80
  text "PART NUMBER:" at 10086.86,1475.22 h80
  text "ELEC ENGR:" at 13416.58,1475.22 h80
  text "ADD:" at 10087.82,1081.52 h80
  text "REV:" at 13417.54,1081.52 h80
  text "www.seeedstudio.com" at 10088.79,795.69 h80
  text "DATE:" at 13430.52,690.18 h80
  text "1" at -14341.13,252.52 h225
  text "2" at -10207.28,252.52 h225
  text "3" at -6073.42,252.52 h225
  text "4" at -1939.56,252.52 h225
  text "5" at 2194.3,252.52 h225
  text "6" at 6328.16,252.52 h225
  text "7" at 10462.02,252.52 h225
  text "8" at 14595.87,252.52 h225
DIMENSION:
  lines w1: -13393.6,9379.48 -13344.4,9379.48 ; -13393.6,9379.48 -13369,9222 ; -13393.6,9379.48 -13344.4,9379.48 ; -13393.6,9379.48 -13369,9222 ; -13393.6,12214.22 -13344.4,12214.22 ; -13393.6,12214.22 -13369,12371.7 ; -13393.6,12214.22 -13344.4,12214.22 ; -13393.6,12214.22 -13369,12371.7 ; -13369,9222 -13344.4,9379.48 ; -13369,9222 -13344.4,9379.48 ; -13369,9222 -13369,10486.75 -13369,9222 ; -13369,12371.7 -13344.4,12214.22 ; -13369,12371.7 -13344.4,12214.22 ; -13369,12371.7 -13369,10799.25 -13369,12371.7 ; -13003,12503 -12845.52,12478.4 ; -13003,12503 -12845.52,12527.6 ; -13003,12503 -12845.52,12478.4 ; -13003,12503 -12845.52,12527.6 ; -13003,12503 -11672.25,12503 -13003,12503 ; -12845.52,12478.4 -12845.52,12527.6 ; -12845.52,12478.4 -12845.52,12527.6 ; -10010.78,12478.4 -10010.78,12527.6 ; -10010.78,12478.4 -9853.3,12503 ; -10010.78,12478.4 -10010.78,12527.6 ; -10010.78,12478.4 -9853.3,12503 ; -10010.78,12527.6 -9853.3,12503 ; -10010.78,12527.6 -9853.3,12503 ; -9853.3,12503 -11019.75,12503 -9853.3,12503 ; -13467.43,9222 -13051.43,9222 -13467.43,9222 ; -13467.43,12371.7 -13051.43,12371.7 -13467.43,12371.7 ; -13003,12420.13 -13003,12601.43 -13003,12420.13 ; -9853.3,12420.13 -9853.3,12601.43 -9853.3,12420.13
  text "80MM" at -11578.5,12440.5 h125
  text "80MM" at -11578.5,12440.5 h125
  text "80MM" at -13601.5,10580.5 h125
  text "80MM" at -13601.5,10580.5 h125
PROBE_TOP:
  text "DDR_UDQS_P-1" at -12395.66,11486.05 h30
  text "DDR_UDQS_N-1" at -12366.63,11486.05 h30
  text "DDR_DQ8" at -12608.8,11453 h30
  text "GND-16" at -12579.55,11448.56 h30
  text "GND-9" at -12774.72,11442.39 h30
  text "DDR_UDQS_N-2" at -12743.22,11442.39 h30
  text "GND-15" at -12581.3,11415.31 h30
  text "DDR_UDQS_P-2" at -12743.22,11410.89 h30
  text "DDR_DQ9" at -12783.95,11410.42 h30
  text "DDR_DQ13" at -12801.26,11383.68 h30
  text "DDR_DQ12" at -12616.61,11383.4 h30
  text "DDR_DQ11" at -12728,11372 h30
  text "DDR_DQ14" at -12657.48,11368.4 h30
  text "DDR_DQ15" at -12743.22,11347.89 h30
  text "GND-13" at -12584,11347.89 h30
  text "DDR_UDM" at -12527,11348.39 h30
  text "GND-8" at -12774.72,11316.39 h30
  text "DDR_LDM" at -12743,11312.6 h30
  text "DDR_DQ1" at -12745.09,11287.87 h30
  text "GND-14" at -12570.74,11278.05 h30
  text "DDR_DQ0" at -12614.78,11250.78 h30
  text "DDR_LDQS_N" at -12669.73,11229.76 h30
  text "DDR_DQ4" at -12583.3,11224.31 h30
  text "DDR_DQ2" at -12616.06,11223.06 h30
  text "DDR_DQ3" at -12741,11216 h30
  text "DDR_LDQS_P" at -12669.63,11202.33 h30
  text "DDR_DQ7" at -12770.1,11190.39 h30
  text "DDR_DQ6" at -12617.22,11190.39 h30
  text "DDR_ODT" at -12641,11136 h30
  text "GND-12" at -12583,11134 h30
  text "GND-10" at -12833.1,11132.01 h30
  text "DDR_CKE" at -12612.6,11132.01 h30
  text "DDR_CSN" at -12770.1,11100.51 h30
  text "DDR_ACTN" at -12650,11101 h30
  text "DDR_A12" at -12740,11100 h30
  text "DDR_A16_RAS" at -12801,11098 h30
  text "DDR_A10" at -12702,11097 h30
  text "DDR_BA1" at -12801.6,11037.51 h30
  text "DDR_A3" at -12770.1,11037.51 h30
  text "DDR_A4" at -12644.1,11037.51 h30
  text "DDR_A15_CAS" at -12682.99,11033.51 h30
  text "DDR_A6" at -12612.6,11006.01 h30
  text "GND-11" at -12800,11003 h30
  text "DDR_A7" at -12801.6,10974.51 h30
  text "DDR_A9" at -12770.1,10974.51 h30
  text "DDR_A8" at -12612.6,10974.51 h30
  text "DDR_A13" at -12801.6,10943.01 h30
  text "DDR_A5" at -12685,10943 h30
  text "DDR_A11" at -12612.6,10943.01 h30
NCLEGEND-1-8:
  circle w1: c-8654.5,7695 r17.71
  lines w1: -9104,6320 -858,6320 ; -9104,6570 -858,6570 ; -9104,6820 -858,6820 ; -9104,7070 -858,7070 ; -9104,7320 -858,7320 ; -9104,7570 -858,7570 ; -9104,7820 -858,7820 ; -9104,8070 -858,8070 ; -9104,8320 -858,8320 ; -9104,8570 -858,8570 ; -9104,8820 -858,8820 ; -9104,9070 -858,9070 ; -9104,9320 -858,9320 ; -9104,9570 -858,9570 ; -9104,9820 -858,9820 ; -9104,10070 -858,10070 ; -9104,10320 -858,10320 ; -9104,10570 -858,10570 ; -9104,10820 -858,10820 ; -8658.5,9945 -8650.5,9945 ; -8654.5,9941 -8654.5,9949 ; -8205,6070 -8205,10570 ; -6190,6070 -6190,10570 ; -4919,6070 -4919,10570 ; -2904,6070 -2904,10570 ; -1633,6070 -1633,10570 ; -9104,6070 -9104,11070 -858,11070 -858,6070 -9104,6070 ; -8746.77,8179.62 ccw(c-8654.5,8179.62) -8562.23,8179.62 -8562.23,8210.38 ccw(c-8654.5,8210.38) -8746.77,8210.38 -8746.77,8179.62 ; -8692.85,9195 -8681.62,9167.88 -8654.5,9156.65 -8627.38,9167.88 -8616.15,9195 -8627.38,9222.12 -8654.5,9233.35 -8681.62,9222.12 -8692.85,9195 ; -8675.17,8674.33 -8654.5,8715.67 -8633.83,8674.33 -8675.17,8674.33 ; -8672.22,8945 -8654.5,8962.72 -8636.78,8945 -8654.5,8927.28 -8672.22,8945 ; -8667.3,9438.6 -8654.5,9432.2 -8641.7,9438.6 -8641.7,9451.4 -8654.5,9457.8 -8667.3,9451.4 -8667.3,9438.6 ; -8666.31,7936.15 -8666.31,7953.85 -8642.69,7953.85 -8642.69,7936.15 -8666.31,7936.15 ; -8665.33,9695 -8659.91,9684.17 -8649.09,9684.17 -8643.67,9695 -8649.09,9705.83 -8659.91,9705.83 -8665.33,9695 ; -8659.92,8412.52 ccw(c-8659.92,8445) -8659.92,8477.48 -8649.08,8477.48 ccw(c-8649.08,8445) -8649.08,8412.52 -8659.92,8412.52 ; -8658.5,10191 -8650.5,10191 -8650.5,10199 -8658.5,10199 -8658.5,10191
  text "DRILL CHART: TOP to BOTTOM" at -6281,10882.5 h125
  text "ALL UNITS ARE IN MILS" at -6031,10632.5 h125
  text "FIGURE" at -8954.5,10382.5 h125
  text "FINISHED_SIZE" at -7847.5,10382.5 h125
  text "ROTATION" at -5954.5,10382.5 h125
  text "TOLERANCE_DRILL" at -4661.5,10382.5 h125
  text "PLATED" at -2568.5,10382.5 h125
  text "QTY" at -1395.5,10382.5 h125
  text "8.0" at -7347.5,10132.5 h125
  text "-" at -5604.5,10132.5 h125
  text "+0.0/-0.0" at -4361.5,10132.5 h125
  text "PLATED" at -2568.5,10132.5 h125
  text "2009" at -1445.5,10132.5 h125
  text "8.0" at -7347.5,9882.5 h125
  text "-" at -5604.5,9882.5 h125
  text "+3.0/-3.0" at -4361.5,9882.5 h125
  text "PLATED" at -2568.5,9882.5 h125
  text "47" at -1345.5,9882.5 h125
  text "21.65" at -7447.5,9632.5 h125
  text "-" at -5604.5,9632.5 h125
  text "+0.0/-0.0" at -4361.5,9632.5 h125
  text "PLATED" at -2568.5,9632.5 h125
  text "19" at -1345.5,9632.5 h125
  text "25.59" at -7447.5,9382.5 h125
  text "-" at -5604.5,9382.5 h125
  text "+0.0/-0.0" at -4361.5,9382.5 h125
  text "PLATED" at -2568.5,9382.5 h125
  text "4" at -1295.5,9382.5 h125
  text "35.43" at -7447.5,9132.5 h125
  text "-" at -5604.5,9132.5 h125
  text "+0.0/-0.0" at -4361.5,9132.5 h125
  text "PLATED" at -2568.5,9132.5 h125
  text "10" at -1345.5,9132.5 h125
  text "35.43" at -7447.5,8882.5 h125
  text "-" at -5604.5,8882.5 h125
  text "+0.0/-0.0" at -4361.5,8882.5 h125
  text "PLATED" at -2568.5,8882.5 h125
  text "4" at -1295.5,8882.5 h125
  text "41.34" at -7447.5,8632.5 h125
  text "-" at -5604.5,8632.5 h125
  text "+0.0/-0.0" at -4361.5,8632.5 h125
  text "PLATED" at -2568.5,8632.5 h125
  text "4" at -1295.5,8632.5 h125
  text "43.31" at -7447.5,8382.5 h125
  text "-" at -5604.5,8382.5 h125
  text "+0.0/-0.0" at -4361.5,8382.5 h125
  text "PLATED" at -2568.5,8382.5 h125
  text "5" at -1295.5,8382.5 h125
  text "123.03" at -7497.5,8132.5 h125
  text "-" at -5604.5,8132.5 h125
  text "+0.0/-0.0" at -4361.5,8132.5 h125
  text "PLATED" at -2568.5,8132.5 h125
  text "4" at -1295.5,8132.5 h125
  text "23.62" at -7447.5,7882.5 h125
  text "-" at -5604.5,7882.5 h125
  text "+0.0/-0.0" at -4361.5,7882.5 h125
  text "NON-PLATED" at -2768.5,7882.5 h125
  text "2" at -1295.5,7882.5 h125
  text "35.43" at -7447.5,7632.5 h125
  text "-" at -5604.5,7632.5 h125
  text "+0.0/-0.0" at -4361.5,7632.5 h125
  text "NON-PLATED" at -2768.5,7632.5 h125
  text "8" at -1295.5,7632.5 h125
  text "47.24" at -7447.5,7382.5 h125
  text "-" at -5604.5,7382.5 h125
  text "+0.0/-0.0" at -4361.5,7382.5 h125
  text "NON-PLATED" at -2768.5,7382.5 h125
  text "6" at -1295.5,7382.5 h125
  text "55.12" at -7447.5,7132.5 h125
  text "-" at -5604.5,7132.5 h125
  text "+0.0/-0.0" at -4361.5,7132.5 h125
  text "NON-PLATED" at -2768.5,7132.5 h125
  text "2" at -1295.5,7132.5 h125
  text "60.0" at -7397.5,6882.5 h125
  text "-" at -5604.5,6882.5 h125
  text "+0.0/-0.0" at -4361.5,6882.5 h125
  text "NON-PLATED" at -2768.5,6882.5 h125
  text "2" at -1295.5,6882.5 h125
  text "66.93" at -7447.5,6632.5 h125
  text "-" at -5604.5,6632.5 h125
  text "+0.0/-0.0" at -4361.5,6632.5 h125
  text "NON-PLATED" at -2768.5,6632.5 h125
  text "2" at -1295.5,6632.5 h125
  text "125.98" at -7497.5,6382.5 h125
  text "-" at -5604.5,6382.5 h125
  text "+0.0/-0.0" at -4361.5,6382.5 h125
  text "NON-PLATED" at -2768.5,6382.5 h125
  text "2" at -1295.5,6382.5 h125
  text "127.95" at -7497.5,6132.5 h125
  text "-" at -5604.5,6132.5 h125
  text "+0.0/-0.0" at -4361.5,6132.5 h125
  text "NON-PLATED" at -2768.5,6132.5 h125
  text "2" at -1295.5,6132.5 h125
  text "TOTAL HOLES:" at -2958,5882.5 h125
  text "2132" at -1445.5,5882.5 h125
NCLEGEND-SLOTS-1-8:
  lines w1: -9057,12243 -811,12243 ; -9057,12493 -811,12493 ; -9057,12743 -811,12743 ; -9057,12993 -811,12993 ; -9057,13243 -811,13243 ; -9057,13493 -811,13493 ; -9057,13743 -811,13743 ; -9057,13993 -811,13993 ; -8158,11993 -8158,13743 ; -6143,11993 -6143,13743 ; -4872,11993 -4872,13743 ; -2857,11993 -2857,13743 ; -1586,11993 -1586,13743 ; -9057,11993 -9057,14243 -811,14243 -811,11993 -9057,11993 ; -8642.93,12082.57 ccw(c-8642.93,12118) -8642.93,12153.43 -8572.07,12153.43 ccw(c-8572.07,12118) -8572.07,12082.57 -8642.93,12082.57 ; -8631.78,12332.57 ccw(c-8631.78,12368) -8631.78,12403.43 -8583.22,12403.43 ccw(c-8583.22,12368) -8583.22,12332.57 -8631.78,12332.57 ; -8625.22,12836.5 ccw(c-8625.22,12868) -8625.22,12899.5 -8589.78,12899.5 ccw(c-8589.78,12868) -8589.78,12836.5 -8625.22,12836.5 ; -8623.25,13348.31 ccw(c-8623.25,13368) -8623.25,13387.69 -8591.75,13387.69 ccw(c-8591.75,13368) -8591.75,13348.31 -8623.25,13348.31 ; -8622.66,13086.5 ccw(c-8622.66,13118) -8622.66,13149.5 -8592.34,13149.5 ccw(c-8592.34,13118) -8592.34,13086.5 -8622.66,13086.5 ; -8617.34,12562.88 ccw(c-8617.34,12618) -8617.34,12673.12 -8597.66,12673.12 ccw(c-8597.66,12618) -8597.66,12562.88 -8617.34,12562.88
  text "SLOT HOLES: TOP to BOTTOM" at -6184,14055.5 h125
  text "ALL UNITS ARE IN MILS" at -5984,13805.5 h125
  text "FIGURE" at -8907.5,13555.5 h125
  text "FINISHED_SIZE" at -7800.5,13555.5 h125
  text "ROTATION" at -5907.5,13555.5 h125
  text "TOLERANCE_DRILL" at -4614.5,13555.5 h125
  text "PLATED" at -2521.5,13555.5 h125
  text "QTY" at -1348.5,13555.5 h125
  text "51.18x19.69" at -7700.5,13305.5 h125
  text "90.000" at -5807.5,13305.5 h125
  text "+0.0/-0.0" at -4314.5,13305.5 h125
  text "PLATED" at -2521.5,13305.5 h125
  text "4" at -1248.5,13305.5 h125
  text "61.81x31.5" at -7650.5,13055.5 h125
  text "90.000" at -5807.5,13055.5 h125
  text "+0.0/-0.0" at -4314.5,13055.5 h125
  text "PLATED" at -2521.5,13055.5 h125
  text "2" at -1248.5,13055.5 h125
  text "66.93x31.5" at -7650.5,12805.5 h125
  text "90.000" at -5807.5,12805.5 h125
  text "+0.0/-0.0" at -4314.5,12805.5 h125
  text "PLATED" at -2521.5,12805.5 h125
  text "2" at -1248.5,12805.5 h125
  text "74.8x55.12" at -7650.5,12555.5 h125
  text "90.000" at -5807.5,12555.5 h125
  text "+0.0/-0.0" at -4314.5,12555.5 h125
  text "PLATED" at -2521.5,12555.5 h125
  text "2" at -1248.5,12555.5 h125
  text "84.0x35.43" at -7650.5,12305.5 h125
  text "0.000" at -5757.5,12305.5 h125
  text "+0.0/-0.0" at -4314.5,12305.5 h125
  text "PLATED" at -2521.5,12305.5 h125
  text "1" at -1248.5,12305.5 h125
  text "106.3x35.43" at -7700.5,12055.5 h125
  text "90.000" at -5807.5,12055.5 h125
  text "+0.0/-0.0" at -4314.5,12055.5 h125
  text "PLATED" at -2521.5,12055.5 h125
  text "4" at -1248.5,12055.5 h125
  text "TOTAL HOLES:" at -2911,11805.5 h125
  text "15" at -1298.5,11805.5 h125
DXF_0119:
  drawing of 1294 lines, arcs and shapes, not listed
DRILLHOLE:
  drawing of 91 lines, arcs and shapes, not listed
DRAWING_ORIGIN:
  lines w1: -25,0 25,0 ; 0,-25 0,25
REVISION_BLOCK:
  lines w11.81: 9178.55,16083.88 10320.28,16083.88 ; 9808.47,15690.18 11265.16,15690.18 ; 10517.13,16083.88 11304.54,16083.88 ; 10910.84,15887.03 11343.91,15887.03 ; 12115.56,15887.03 12548.63,15887.03 ; 12367.53,16083.88 12525.01,16083.88
Mechanical 255:
  lines w1: -12727,11667.7 -12404,11667.7 -12404,11971.7 -12410,11977.7 -12713,11977.7 -12727,11963.7 -12727,11667.7 ; -12365,10970 -12359.7,10964.7 -12308,10964.7 -11697,10964.7 -11697,11562.7 -12308,11562.7 -12361.3,11562.7 -12365,11559 -12365,10970